# Altium PCB LCR.PcbDoc (part 1 of 2)
Units mil, origin at the board's own origin, x right, y up, seen from the top; angles counter-clockwise.
Board outline 3937.01 x 3149.61 mil, 2 copper layers (Top, Bottom); 95 components, 118 nets, 438 pads, 285 vias.
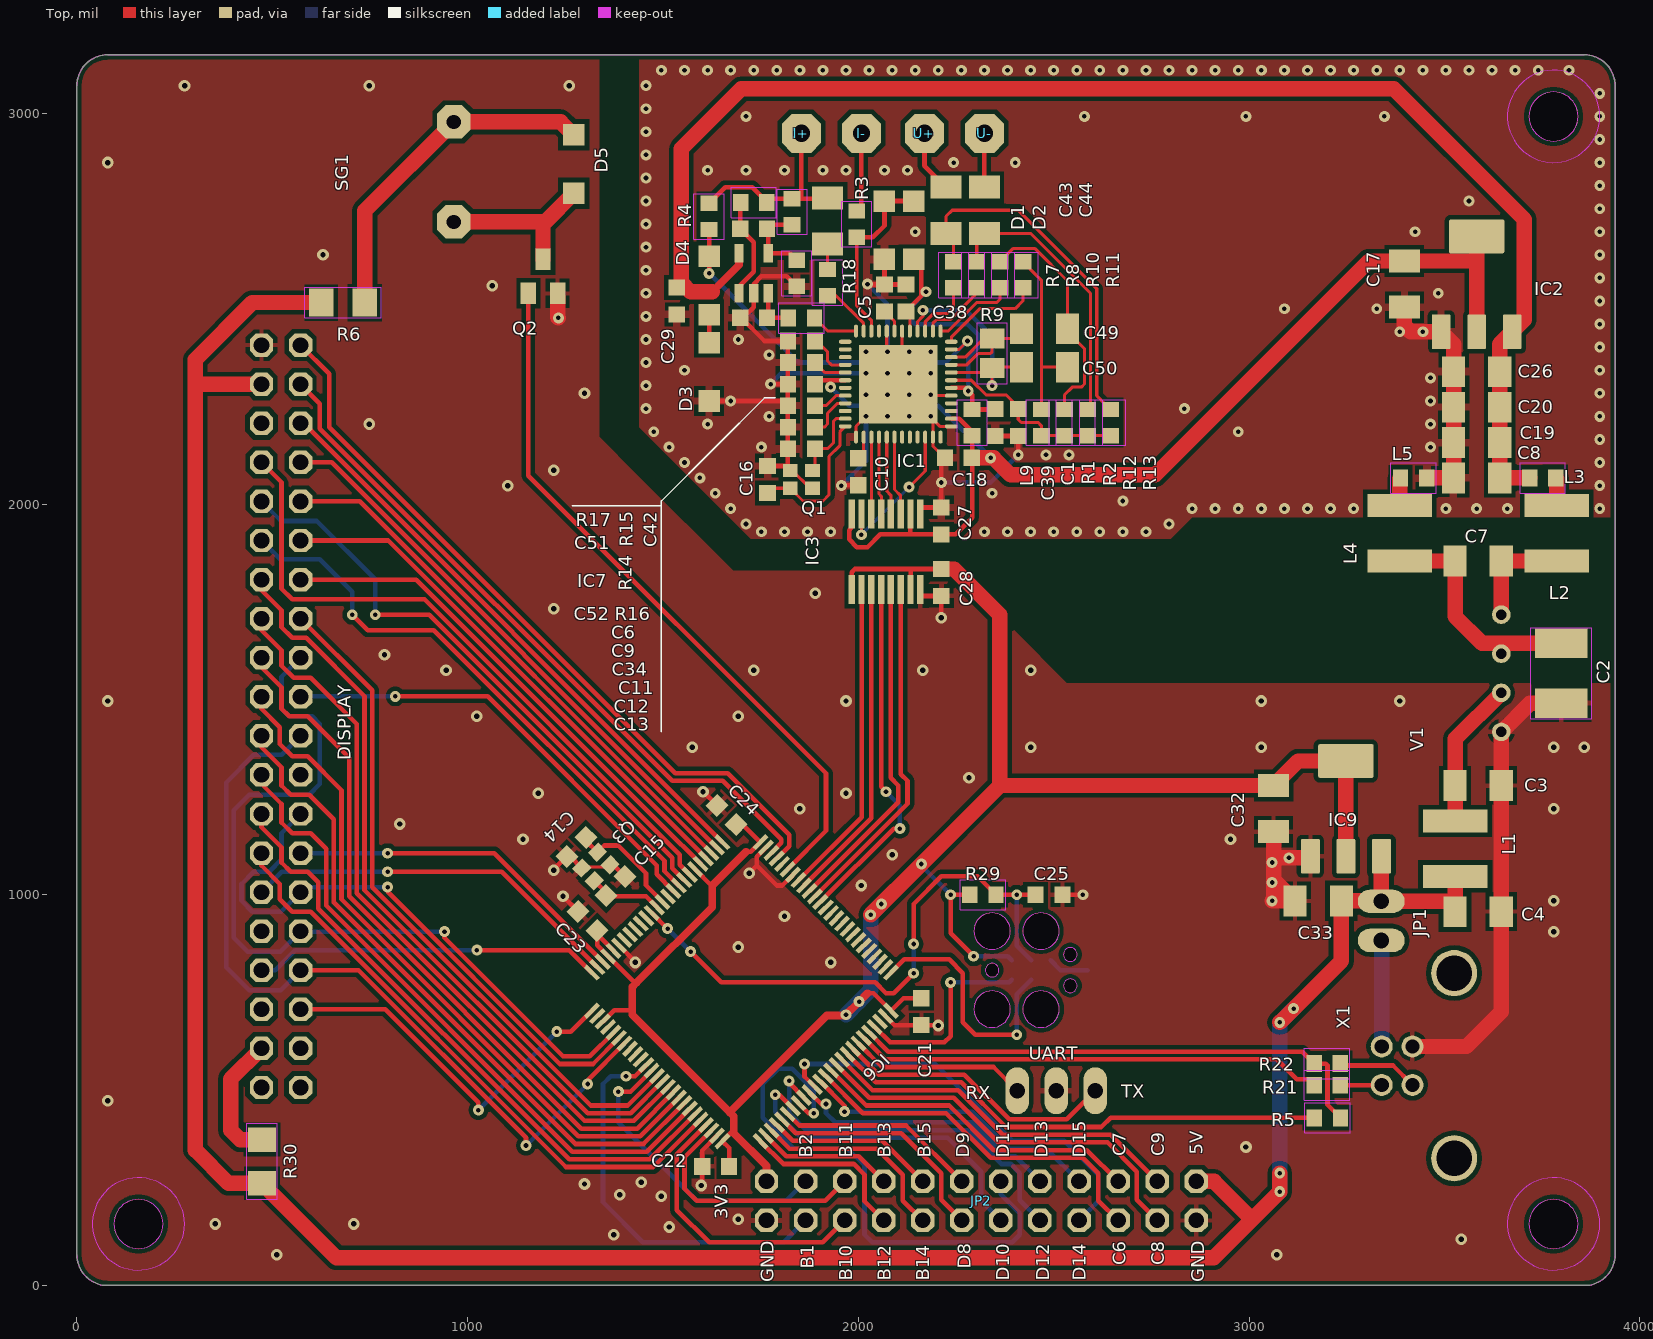
[diagram p0: Top view]
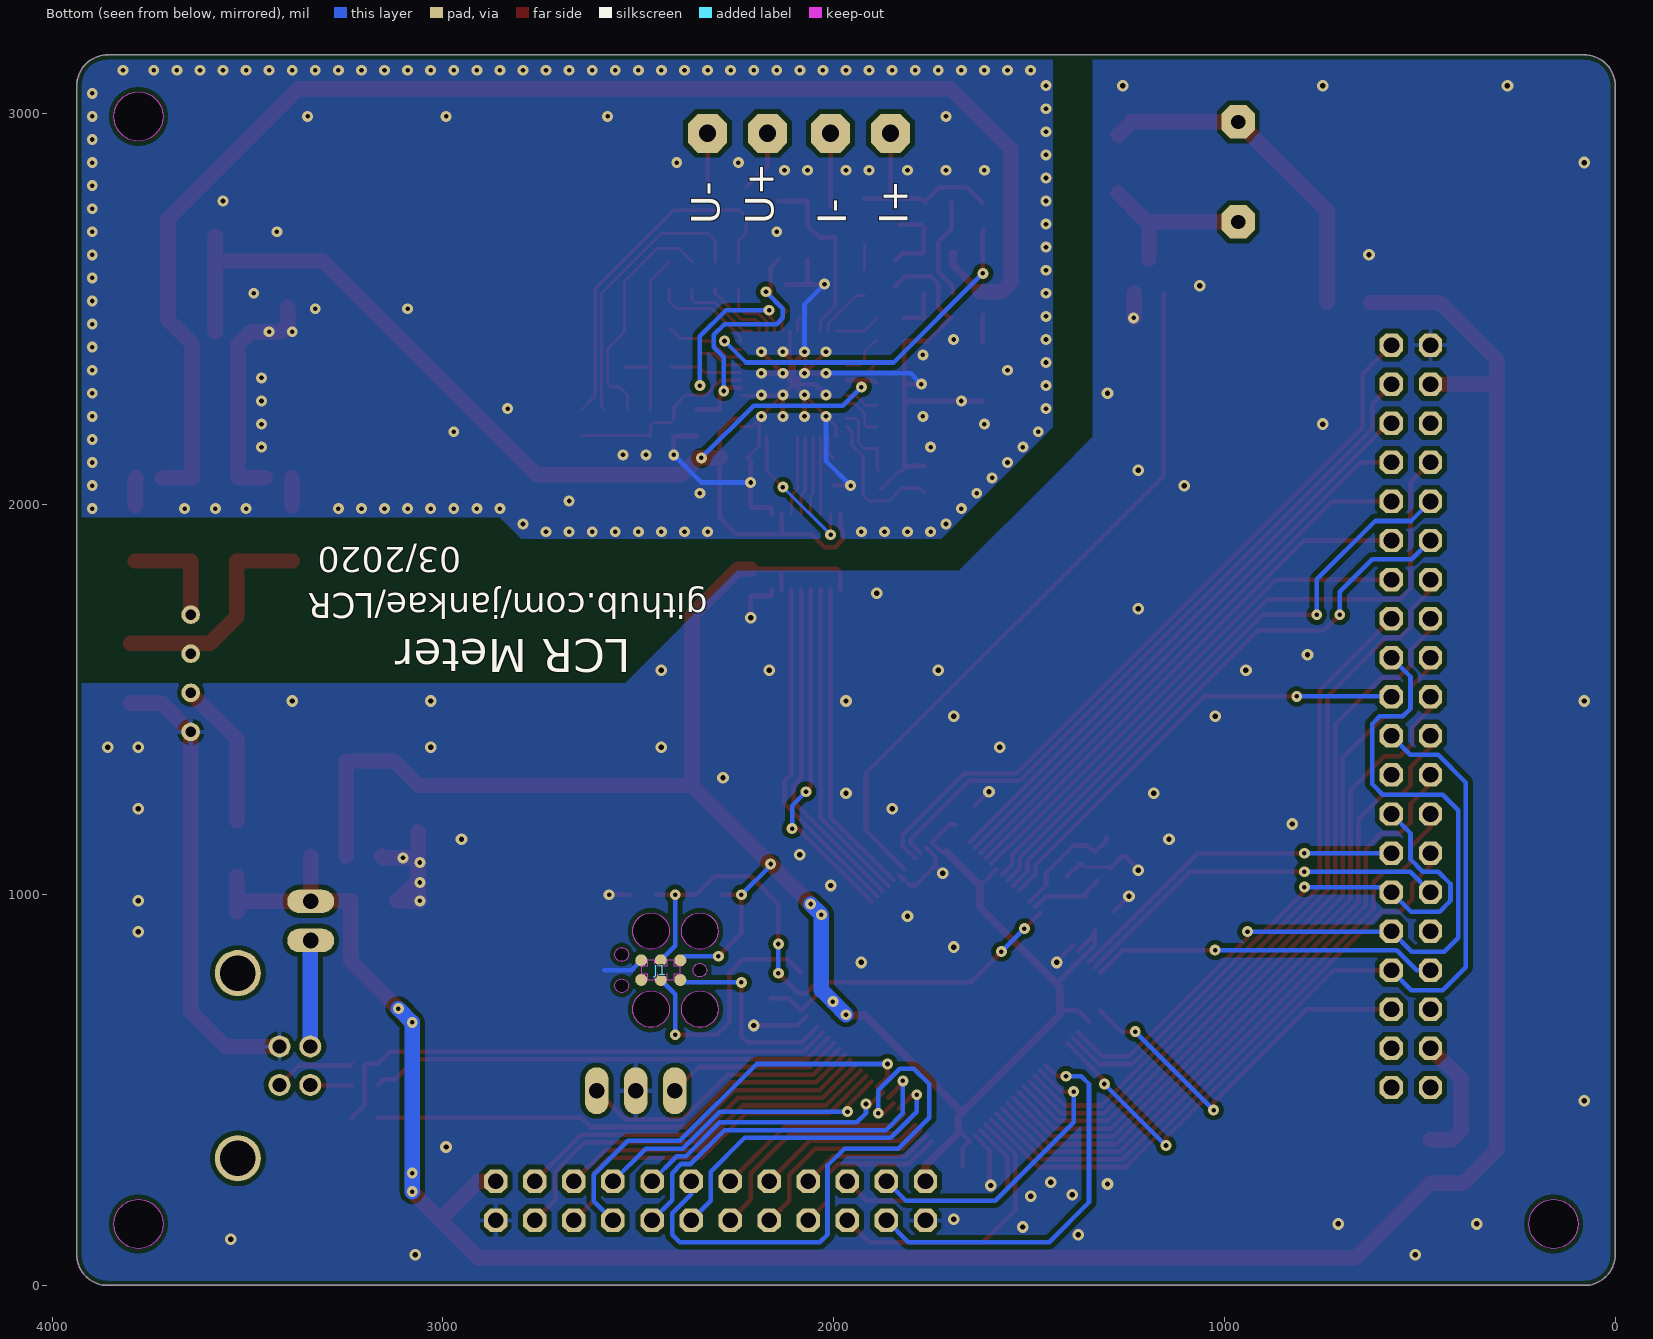
[diagram p1: Bottom view, seen from below]

## Layer stack, top to bottom
Top Solder: solder mask 0.4, Solder Resist, Dk 3.5
Top: signal copper 1.378
Dielectric 1: dielectric 12.6, FR-4, Dk 4.8
Bottom: signal copper 1.378
Bottom Solder: solder mask 0.4, Solder Resist, Dk 3.5

## Board outline
0,78.74 0,3070.87 cw(c78.74,3070.87) 78.74,3149.61 3858.27,3149.61 cw(c3858.27,3070.87) 3937.01,3070.87 3937.01,78.74 cw(c3858.27,78.74) 3858.27,0 78.74,0 cw(c78.74,78.74)
cut-out: 157.48,94.49 ccw(c157.48,157.48) 220.47,157.48 ccw(c157.48,157.48) 157.48,220.47 ccw(c157.48,157.48) 94.49,157.48 ccw(c157.48,157.48)
cut-out: 3779.53,2929.14 ccw(c3779.53,2992.13) 3842.52,2992.13 ccw(c3779.53,2992.13) 3779.53,3055.12 ccw(c3779.53,2992.13) 3716.54,2992.13 ccw(c3779.53,2992.13)
cut-out: 3779.53,94.49 ccw(c3779.53,157.48) 3842.52,157.48 ccw(c3779.53,157.48) 3779.53,220.47 ccw(c3779.53,157.48) 3716.54,157.48 ccw(c3779.53,157.48)
cut-out: 2342.52,860.34 ccw(c2342.52,907.09) 2389.27,907.09 ccw(c2342.52,907.09) 2342.52,953.84 ccw(c2342.52,907.09) 2295.77,907.09 ccw(c2342.52,907.09)
cut-out: 2342.52,660.34 ccw(c2342.52,707.09) 2389.27,707.09 ccw(c2342.52,707.09) 2342.52,753.84 ccw(c2342.52,707.09) 2295.77,707.09 ccw(c2342.52,707.09)
cut-out: 2467.52,660.34 ccw(c2467.52,707.09) 2514.27,707.09 ccw(c2467.52,707.09) 2467.52,753.84 ccw(c2467.52,707.09) 2420.77,707.09 ccw(c2467.52,707.09)
cut-out: 2467.52,860.34 ccw(c2467.52,907.09) 2514.27,907.09 ccw(c2467.52,907.09) 2467.52,953.84 ccw(c2467.52,907.09) 2420.77,907.09 ccw(c2467.52,907.09)
cut-out: 2342.52,789.59 ccw(c2342.52,807.09) 2360.02,807.09 ccw(c2342.52,807.09) 2342.52,824.59 ccw(c2342.52,807.09) 2325.02,807.09 ccw(c2342.52,807.09)
cut-out: 2542.52,829.59 ccw(c2542.52,847.09) 2560.02,847.09 ccw(c2542.52,847.09) 2542.52,864.59 ccw(c2542.52,847.09) 2525.02,847.09 ccw(c2542.52,847.09)
cut-out: 2542.52,749.59 ccw(c2542.52,767.09) 2560.02,767.09 ccw(c2542.52,767.09) 2542.52,784.59 ccw(c2542.52,767.09) 2525.02,767.09 ccw(c2542.52,767.09)

## Design rules (kind name [scope] priority, off if disabled: settings)
BoardOutlineClearance mdCopperDimension [All] p1: gap=10 ignorepadtopadclearanceinfootprint=FALSE except(0: Arc-SplitContinuation Track-SplitContinuation SMDPad-SplitContinuation THPad-SplitContinuation Via-SplitContinuation Fill-SplitContinuation Poly-SplitContinuation Region-SplitContinuation Text-SplitContinuation; 7.87: Poly-OutlineEdge Poly-CavityEdge Poly-CutoutEdge Poly-SplitBarrior)
Clearance Clearance_for_PolygonClass_Isolate_11.81 [InPolygonClass('Isolate_11.81') vs IsArc Or IsTrack Or IsPad Or IsVia Or IsFill Or IsRegion Or IsText] p1: gap=11.81 ignorepadtopadclearanceinfootprint=FALSE
Clearance "Clearance (Same Net)" [All] p2: gap=3.5 ignorepadtopadclearanceinfootprint=FALSE
Clearance [All] p3: gap=3.5 ignorepadtopadclearanceinfootprint=FALSE
HoleSize [All] p1: absolutevalues=TRUE maxlimit=100000 minlimit=11.81 maxpercent=80.000 minpercent=20.000
HoleToHoleClearance mdDrill [All] p1: gap=7.87 allowstackedmicrovias=TRUE
MinimumSolderMaskSliver [All] p1 off: minsoldermaskwidth=10
PasteMaskExpansion Expansion_SMDPaste_OFF [InPadClass('SMDPaste_OFF')] p1: expansion=0
PasteMaskExpansion mlMinCreamFrame [All] p2: expansion=0
PolygonConnect PolygonConnect_For_PolygonThermal_ON_Width196900_Gap100000 [InPolygonClass('PolygonThermal_ON_Width196900_Gap100000') vs Not IsVia] p1: connectstyle=Relief reliefconductorwidth=19.69 reliefentries=4 polygonreliefangle="90 Angle" airgapwidth=10
PolygonConnect PolygonConnect_For_PolygonThermal_ON_Width118100_Gap100000 [InPolygonClass('PolygonThermal_ON_Width118100_Gap100000') vs Not IsVia] p2: connectstyle=Relief reliefconductorwidth=11.81 reliefentries=4 polygonreliefangle="90 Angle" airgapwidth=10
PolygonConnect ThermalVias [IsVia] p3: connectstyle=Direct reliefconductorwidth=10 reliefentries=4 polygonreliefangle="90 Angle" airgapwidth=10
PolygonConnect [All] p4: connectstyle=Relief reliefconductorwidth=10 reliefentries=4 polygonreliefangle="90 Angle" airgapwidth=10
RoutingVias [All] p1: holewidth=11.81 width=27.81 viastyle="Through Hole" minholewidth=11.81 minwidth=27.81 maxholewidth=100 maxwidth=100
SolderMaskExpansion Expansion_SMDSolder_OFF [InPadClass('SMDSolder_OFF')] p1: expansion=0 istentingtop=FALSE
SolderMaskExpansion mlMinStopFrame [All] p2: expansion=4 istentingtop=FALSE
Width [All] p1: maxlimit=10000 minlimit=6 preferedwidth=6
26 further rules are at their usual default settings.

## Classes and differential pairs
polygon class PolygonThermal_ON_Width196900_Gap100000: Polygon_1_Net_AGND Polygon_2_Net_AGND
polygon class PolygonThermal_ON_Width118100_Gap100000: Polygon_1_Net_GND Polygon_2_Net_GND
polygon class Isolate_11.81: Polygon_1_Net_AGND Polygon_1_Net_GND Polygon_2_Net_AGND Polygon_2_Net_GND
pad class SMDSolder_OFF: Q1-1 Q1-2 Q1-3 Q1-4 Q3-1 Q3-2 Q3-3 Q3-4
pad class SMDPaste_OFF: J1-1 J1-2 J1-3 J1-4 J1-5 J1-6 Q1-1 Q1-2 Q1-3 Q1-4 Q3-1 Q3-2 Q3-3 Q3-4

## Components (designator, comment, footprint, x,y, rotation, side; value= is the part's Value field where it differs from the comment)
C1 "470n" C0603K 2409.45,2208.66 r270 top
C2 "470p/3kV" C1812 3799.21,1566.93 r270 top
C3 "10u/16V" C1206K 3586.61,1279.53 r0 top
C4 "10u/16V" C1206K 3586.61,956.69 r0 top
C5 "4u7" C0603K 2066.93,2527.56 r90 top
C6 "470n" C0603K 1854.33,2417.32 r180 top
C7 "10u/25V" C1206K 3586.61,1854.33 r180 top
C8 "10u/25V" C1206K 3582.68,2066.93 r180 top
C9 "470n" C0603K 1854.33,2362.2 r180 top
C10 "470n" C0603K 2000,2082.68 r270 top
C11 "100n" C0603K 1854.33,2251.97 r180 top
C12 "1u" C0603K 1854.33,2196.85 r180 top
C13 "10p" C0603K 1854.33,2141.73 r180 top
C14 "12p" C0603K 1278.29,1122.61 r225 top
C15 "12p" C0603K 1378.51,1022.39 r45 top
C16 "10p" C0603K 1767.72,2062.99 r90 top
C17 "10u/16V" C1206K 3397.64,2562.99 r270 top
C18 "100n" C0603K 2255.91,2118.11 r180 top
C19 "10u/25V" C1206K 3582.68,2157.48 r180 top
C20 "10u/25V" C1206K 3582.68,2248.03 r180 top
C21 "100n" C0603K 2161.42,700.79 r90 top
C22 "100n" C0603K 1635.04,304.43 r0 top
C23 "100n" C0603K 1307.09,933.07 r315 top
C24 "100n" C0603K 1663.05,1204.05 r315 top
C25 "100n" C0603K 2488.19,1000 r0 top
C26 "10u/25V" C1206K 3582.68,2338.58 r180 top
C27 "100n" C0603K 2212.6,1956.69 r90 top
C28 "100n" C0603K 2212.6,1799.21 r270 top
C29 "1u" C0603K 1535.43,2519.69 r90 top
C32 "10u/16V" C1206K 3062.99,1220.47 r270 top
C33 "10u/16V" C1206K 3177.17,984.25 r180 top
C34 "100n" C0603K 1854.33,2307.09 r180 top
C38 "100n" C0603K 2122.05,2527.56 r90 top
C39 "100n" C0603K 2350.39,2208.66 r270 top
C42 "10u" C1206K 1921.26,2724.41 r90 top
C43 "10u" C1206K 2224.41,2751.97 r90 top
C44 "10u" C1206K 2322.83,2751.97 r90 top
C49 "10u" C1206K 2476.38,2448.82 r180 top
C50 "10u" C1206K 2476.38,2350.39 r180 top
C51 "100n" C0603K 1732.28,2704.72 r180 top
C52 "100n" C0603K 1732.28,2476.38 r0 top
D1 "BAS116" SOD123 2066.93,2700.79 r270 top
D2 "BAS116" SOD123 2141.73,2700.79 r90 top
D3 "BAS116" SOD123 1618.11,2338.58 r90 top
D4 "BAS116" SOD123 1618.11,2559.06 r90 top
D5 "4148" SOD123 1271.65,2870.08 r270 top
DISPLAY "SAINSMART_TFT_3.2V" SAINSMART_ANGLED 472.44,1456.69 r270 top
I+ "" 2,54/1,1 1854.33,2948.82 r90 top
I- "" 2,54/1,1 2007.87,2948.82 r90 top
IC1 "AD5941" QFN50P700X700X80-49T510N 2102.36,2307.09 r0 top
IC2 "VREG-TS1117CW-3V3" SOT223 3582.68,2562.99 r90 top
IC3 "SI8651EB-B-IU" SOP63P600X175-16N 2070.87,1877.95 r90 top
IC6 "STM32F303VCT" LQFP100 1700.79,751.97 r225 top
IC7 "OPA237N" SOT23-5 1732.28,2590.55 r0 top
IC9 "VREG-TS1117CW-3V3" SOT223 3248.03,1220.47 r90 top
J1 "" TC2030-MCP 2342.52,807.09 r0 bottom
JP1 "" 1X02 3338.58,933.07 r270 top
JP2 "" 2X12 2314.96,216.54 r0 top
L1 "SRN5020TA-100M" SRN5040 3527.56,1118.11 r90 top
L2 "SRN5020TA-100M" SRN5040 3787.4,1925.2 r90 top
L3 "Ferrite" R0603 3751.97,2066.93 r180 top
L4 "SRN5020TA-100M" SRN5040 3385.83,1925.2 r90 top
L5 "Ferrite" R0603 3421.26,2066.93 r0 top
L9 "Ferrite" R0603 2291.34,2208.66 r90 top
Q1 "FA-128" FA-128 1854.33,2062.99 r180 top
Q2 "BSS123" SOT23 1192.91,2582.68 r0 top
Q3 "FA-128" FA-128 1328.4,1072.5 r225 top
R1 "1M" R0603 2468.5,2208.66 r270 top
R2 "1M" R0603 2527.56,2208.66 r270 top
R3 "10" R0603 1996.06,2716.54 r270 top
R4 "100k" R0603 1618.11,2736.22 r270 top
R5 "1k5" R0603 3200.79,429.13 r180 top
R6 "27" R1206 681.1,2515.75 r180 top
R7 "10k" R0603 2244.09,2586.61 r90 top
R8 "10k" R0603 2303.15,2586.61 r90 top
R9 "1k 0.01% 2ppm" M0805 2342.52,2385.83 r270 top
R10 "10k" R0603 2362.2,2586.61 r90 top
R11 "10k" R0603 2421.26,2586.61 r90 top
R12 "1M" R0603 2586.61,2208.66 r270 top
R13 "1M" R0603 2645.67,2208.66 r270 top
R14 "10k" R0603 1842.52,2590.55 r90 top
R15 "39k" R0603 1830.71,2748.03 r270 top
R16 "10k" R0603 1854.33,2476.38 r0 top
R17 "100" R0603 1732.28,2771.65 r180 top
R18 "10" R0603 1921.26,2566.93 r270 top
R21 "22" R0603 3200,512.5 r0 top
R22 "22" R0603 3200,567.82 r0 top
R29 "10k" R0603 2318.9,1000 r0 top
R30 "27" R1206 473.82,317.42 r270 top
SG1 "CEM-1203(42)" F/QMBIII 964.57,2850.39 r90 top
U+ "" 2,54/1,1 2169.29,2948.82 r90 top
U- "" 2,54/1,1 2322.83,2948.82 r90 top
UART "" 1X03 2506.59,498.43 r0 top
V1 "TBA-1 0512" TME 3645.67,1566.93 r90 top
X1 "MINI-USB_SHIELD4P-85-32004-00X" 85-32004-00X 3525,562.5 r180 top

## Footprints (in the part's own frame and the unit in brackets; to place one, negate y for a bottom-side part, rotate by r counter-clockwise, add the part's x,y. Pads: shape width x height; smd on the part's side, far side on the other; paste and mask are expansions set on the pad)
1X02 [mil] "1X02"
  oval 60x120 hole 40: 1(-50,0) 2(50,0)
1X03 [mil] "1X03"
  oval 60x120 hole 40: 1(-100,0) 2(0,0) 3(100,0)
2,54/1,1 [mil] "2,54/1,1"
  oct 100x100 / inner round 92.39 / far side oct 100x100 hole 44: 1(0,0)
2X12 [mil] "2X12"
  oct 60x60 / inner round 55.43 / far side oct 60x60 hole 40: 1(-550,-50) 2(-550,50) 3(-450,-50) 4(-450,50) 5(-350,-50) 6(-350,50) 7(-250,-50) 8(-250,50) 9(-150,-50) 10(-150,50) 11(-50,-50) 12(-50,50) 13(50,-50) 14(50,50) 15(150,-50) 16(150,50) 17(250,-50) 18(250,50) 19(350,-50) 20(350,50) 21(450,-50) 22(450,50) 23(550,-50) 24(550,50)
85-32004-00X [mm] "85-32004-00X"
  round 1.428 hole 0.92: 1(4.71,-1.25) 2(4.71,1.25) 3(2.71,1.25) 4(2.71,-1.25)
  round 3 hole 2.3: M1(0,6.02) M2(0,-6.02)
C0603K [mm] "C0603K"
  rect 1.05x1.08 smd: 1(-0.875,0) 2(0.875,0)
C1206K [mm] "C1206K"
  rect 1.5x2 smd: 1(-1.5,0) 2(1.5,0)
C1812 [mil] "C1812"
  rect 74.8x133.86 smd: 1(-76.77,0) 2(76.77,0)
  Top keep-out lines w2: 117.05,-78.07 117.05,78.07 -117.05,78.07 -117.05,-78.07 117.05,-78.07
F/QMBIII [mil] "F/QMBIII"
  oct 85x85 / inner round 78.53 / far side oct 85x85 hole 36: +(128,0) -(-128,0)
FA-128 [mil] "FA-128"
  rect 37.4x33.46 smd paste+0 mask+0: 1(-28.54,-22.64) 2(28.54,-22.64) 3(28.54,22.64) 4(-28.54,22.64)
LQFP100 [mm] "LQFP100"
  rect 0.3x1.2 smd: 1(-6,-7.75) 2(-5.5,-7.75) 3(-5,-7.75) 4(-4.5,-7.75) 5(-4,-7.75) 6(-3.5,-7.75) 7(-3,-7.75) 8(-2.5,-7.75) 9(-2,-7.75) 10(-1.5,-7.75) 11(-1,-7.75) 12(-0.5,-7.75) 13(0,-7.75) 14(0.5,-7.75) 15(1,-7.75) 16(1.5,-7.75) 17(2,-7.75) 18(2.5,-7.75) 19(3,-7.75) 20(3.5,-7.75) 21(4,-7.75) 22(4.5,-7.75) 23(5,-7.75) 24(5.5,-7.75) 25(6,-7.75) 51(6,7.75) 52(5.5,7.75) 53(5,7.75) 54(4.5,7.75) 55(4,7.75) 56(3.5,7.75) 57(3,7.75) 58(2.5,7.75) 59(2,7.75) 60(1.5,7.75) 61(1,7.75) 62(0.5,7.75) 63(0,7.75) 64(-0.5,7.75) 65(-1,7.75) 66(-1.5,7.75) 67(-2,7.75) 68(-2.5,7.75) 69(-3,7.75) 70(-3.5,7.75) 71(-4,7.75) 72(-4.5,7.75) 73(-5,7.75) 74(-5.5,7.75) 75(-6,7.75)
  rect 1.2x0.3 smd: 26(7.75,-6) 27(7.75,-5.5) 28(7.75,-5) 29(7.75,-4.5) 30(7.75,-4) 31(7.75,-3.5) 32(7.75,-3) 33(7.75,-2.5) 34(7.75,-2) 35(7.75,-1.5) 36(7.75,-1) 37(7.75,-0.5) 38(7.75,0) 39(7.75,0.5) 40(7.75,1) 41(7.75,1.5) 42(7.75,2) 43(7.75,2.5) 44(7.75,3) 45(7.75,3.5) 46(7.75,4) 47(7.75,4.5) 48(7.75,5) 49(7.75,5.5) 50(7.75,6) 76(-7.75,6) 77(-7.75,5.5) 78(-7.75,5) 79(-7.75,4.5) 80(-7.75,4) 81(-7.75,3.5) 82(-7.75,3) 83(-7.75,2.5) 84(-7.75,2) 85(-7.75,1.5) 86(-7.75,1) 87(-7.75,0.5) 88(-7.75,0) 89(-7.75,-0.5) 90(-7.75,-1) 91(-7.75,-1.5) 92(-7.75,-2) 93(-7.75,-2.5) 94(-7.75,-3) 95(-7.75,-3.5) 96(-7.75,-4) 97(-7.75,-4.5) 98(-7.75,-5) 99(-7.75,-5.5) 100(-7.75,-6)
M0805 [mil] "M0805"
  rect 51.18x62.99 smd: 1(-37.4,0) 2(37.4,0)
  Top keep-out lines w2: 77.68,-38.7 77.68,38.7 -77.68,38.7 -77.68,-38.7 77.68,-38.7
QFN50P700X700X80-49T510N [mil] "QFN50P700X700X80-49T510N"
  rrect100% 32.99x10.39 smd: 1(-135.65,108.27) 2(-135.65,88.58) 3(-135.65,68.9) 4(-135.65,49.21) 5(-135.65,29.53) 6(-135.65,9.84) 7(-135.65,-9.84) 8(-135.65,-29.53) 9(-135.65,-49.21) 10(-135.65,-68.9) 11(-135.65,-88.58) 12(-135.65,-108.27) 25(135.65,-108.27) 26(135.65,-88.58) 27(135.65,-68.9) 28(135.65,-49.21) 29(135.65,-29.53) 30(135.65,-9.84) 31(135.65,9.84) 32(135.65,29.53) 33(135.65,49.21) 34(135.65,68.9) 35(135.65,88.58) 36(135.65,108.27)
  rrect100% 10.39x32.99 smd: 13(-108.27,-135.65) 14(-88.58,-135.65) 15(-68.9,-135.65) 16(-49.21,-135.65) 17(-29.53,-135.65) 18(-9.84,-135.65) 19(9.84,-135.65) 20(29.53,-135.65) 21(49.21,-135.65) 22(68.9,-135.65) 23(88.58,-135.65) 24(108.27,-135.65) 37(108.27,135.65) 38(88.58,135.65) 39(68.9,135.65) 40(49.21,135.65) 41(29.53,135.65) 42(9.84,135.65) 43(-9.84,135.65) 44(-29.53,135.65) 45(-49.21,135.65) 46(-68.9,135.65) 47(-88.58,135.65) 48(-108.27,135.65)
  rect 200.79x200.79 smd: 49(0,0)
R0603 [mm] "R0603"
  rect 1x1.1 smd: 1(-0.85,0) 2(0.85,0)
  Top keep-out lines w0.051: 1.473,0.983 1.473,-0.983 -1.473,-0.983 -1.473,0.983 1.473,0.983
R1206 [mil] "R1206"
  rect 62.99x70.98 smd: 1(-55.98,0) 2(55.98,0)
  Top keep-out lines w2: 97.36,38.7 97.36,-38.7 -97.36,-38.7 -97.36,38.7 97.36,38.7
SAINSMART_ANGLED [mil] "SAINSMART_ANGLED"
  oct 60x60 / inner round 55.43 / far side oct 60x60 hole 40: 1(-950,0) 2(-950,100) 3(-850,0) 4(-850,100) 5(-750,0) 6(-750,100) 7(-650,0) 8(-650,100) 9(-550,0) 10(-550,100) 11(-450,0) 12(-450,100) 13(-350,0) 14(-350,100) 15(-250,0) 16(-250,100) 17(-150,0) 18(-150,100) 19(-50,0) 20(-50,100) 21(50,0) 22(50,100) 23(150,0) 24(150,100) 25(250,0) 26(250,100) 27(350,0) 28(350,100) 29(450,0) 30(450,100) 31(550,0) 32(550,100) 33(650,0) 34(650,100) 35(750,0) 36(750,100) 37(850,0) 38(850,100) 39(950,0) 40(950,100)
SOD123 [mil] "SOD123"
  rect 55.12x55.12 smd: A(74.8,0) C(-74.8,0)
SOP63P600X175-16N [mil] "SOP63P600X175-16N"
  rect 74.84x16.14 smd: 1(-96.67,87.5) 2(-96.67,62.5) 3(-96.67,37.5) 4(-96.67,12.5) 5(-96.67,-12.5) 6(-96.67,-37.5) 7(-96.67,-62.5) 8(-96.67,-87.5) 9(96.67,-87.5) 10(96.67,-62.5) 11(96.67,-37.5) 12(96.67,-12.5) 13(96.67,12.5) 14(96.67,37.5) 15(96.67,62.5) 16(96.67,87.5)
SOT23 [mm] "SOT23"
  rect 1x1.4 smd: 1(-0.95,-1.1) 2(0.95,-1.1) 3(0,1.1)
SOT23-5 [mil] "SOT23-5"
  rect 23.62x47.24 smd: 1(-37.4,-51.42) 2(0,-51.42) 3(37.4,-51.42) 4(37.4,51.42) 5(-37.4,51.42)
SOT223 [mil] "SOT223"
  rrect10% 87.99x47.99 smd: 1(-122.01,90.98) 2(-122.01,0) 3(-122.01,-90.98)
  rrect10% 86.61x141.73 smd: 4(122.01,0)
SRN5040 [mil] "SRN5040"
  rect 59.06x165.35 smd: P$1(-70.87,0) P$2(70.87,0)
TC2030-MCP [mil] "TC2030-MCP"
  rrect100% 31x31 smd paste+0: 1(50,-25) 2(50,25) 3(100,-25) 4(100,25) 5(150,-25) 6(150,25)
  Top keep-out region: 50,-9.5 65.5,-9.5 65.5,-25 84.5,-25 84.5,-9.5 115.5,-9.5 115.5,-25 134.5,-25 134.5,-9.5 150,-9.5 150,9.5 134.5,9.5 134.5,25 115.5,25 115.5,9.5 84.5,9.5 84.5,25 65.5,25 65.5,9.5 50,9.5 50,-9.5
TME [mil] "TME"
  round 47.56 hole 27.56: 1(-150,0) 2(-50,0) 3(50,0) 4(150,0)

## Part data
C1 C5 C6 C9 C10 C11 C12 C13 C14 C15 C16 C18 C21 C22 C23 C24 C25 C27 C28 C29 C34 C38 C39 C51 C52: library part C0603K, PackageName=C0603K
C2: library part C1812, PackageName=C1812
C3 C4 C7 C8 C17 C19 C20 C26 C32 C33 C42 C43 C44 C49 C50: library part C1206K, PackageName=C1206K
D1 D2 D3 D4 D5: library part SOD123, PackageName=SOD123
DISPLAY: library part SAINSMART_ANGLED, PackageName=SAINSMART_ANGLED
I+ I- U+ U-: library part 2,54/1,1, PackageName=2,54/1,1
IC1: library part QFN50P700X700X80-49T510N, PackageName=QFN50P700X700X80-49T510N
IC2 IC9: library part SOT223, PackageName=SOT223
IC3: library part SOP63P600X175-16N, PackageName=SOP63P600X175-16N
IC6: library part LQFP100, PackageName=LQFP100
IC7: library part SOT23-5, PackageName=SOT23-5
J1: library part TC2030-MCP, PackageName=TC2030-MCP
JP1: library part 1X02, PackageName=1X02
JP2: library part 2X12, PackageName=2X12
L1 L2 L4: library part SRN5040, PackageName=SRN5040
L3 L5 L9 R1 R2 R3 R4 R5 R7 R8 R10 R11 R12 R13 R14 R15 R16 R17 R18 R21 R22 R29: library part R0603, PackageName=R0603
Q2: library part SOT23, PackageName=SOT23
R6 R30: library part R1206, PackageName=R1206
R9: library part M0805, PackageName=M0805
SG1: library part F/QMBIII, PackageName=F/QMBIII
UART: library part 1X03, PackageName=1X03
V1: library part TME, PackageName=TME
X1: library part 85-32004-00X, PackageName=85-32004-00X
Q1 Q3: PackageName=FA-128

## Free pads (board coordinates)
  round 35 hole 35 unplated: MH1(2342.52,807.09) MH2(2542.52,847.09) MH3(2542.52,767.09)
  round 125.98 hole 125.98 unplated: MH1(3779.53,157.48) MH2(3779.53,2992.13) MH3(157.48,157.48)
  round 93.5 hole 93.5 unplated: MH4(2342.52,707.09) MH5(2342.52,907.09) MH6(2467.52,907.09) MH7(2467.52,707.09)

## Via types
v1: diameter 27.81/27.81 (per signal layer), hole 11.81, Top to Bottom, 220 vias
v2: diameter 29.78/29.78 (per signal layer), hole 13.78, Top to Bottom, 65 vias

## Nets (pads, with @x,y where several pads share a name; then routed paths per layer and width w, separated by ;. In a path a pad name is that pad's centre, name@x,y a point inside that pad or via, vN(x,y) a via of type N, cw(c..) or ccw(c..) an arc to the next point about the centre after c; other vN are vias at no path point)
+3V3: C21.2 C22.2 C23.2 C24.2 C28.1 C32.1 IC3.1 IC3.7 IC6.6 IC6.21 IC6.22 IC6.28 IC6.50 IC6.75 IC6.100 IC9.2 IC9.4 J1.1 JP2.2 R29.1 | length 5779.6
  Top w11.81: IC6.28@1345.84,675.41 1375.15,704.72 1421.26,704.72 ; IC6.21@1373.68,856.37 1331.45,898.6 C23.2@1331.45,908.71 1331.45,870.76 IC6.22@1359.76,842.44 1426.62,775.59 1433.07,775.59 ; IC6.6@1582.48,1065.16 1624.01,1023.62 1625.98,1023.62 ; C22.2@1669.49,304.43 1669.49,351.77 IC6.50@1652.07,369.18 1681.1,398.22 1681.1,433.07 ; C24.2@1687.41,1179.69 1704.57,1179.69 IC6.100@1749.51,1134.76 1724.99,1110.24 1712.6,1110.24 ; IC3.1@1983.37,1781.28 1983.37,1825.89 1991.14,1833.66 2133.86,1833.66 ; 2023.62,748.03 2038.79,748.03 2083.57,703.25 2115.56,735.24 C21.2@2161.42,735.24 ; IC3.7@2133.37,1781.28 2133.86,1781.78 2133.86,1833.66 ; C28.1@2212.6,1833.66 2133.86,1833.66 ; R29.1@2285.44,1000 v1(2236.22,1000) 2236.22,901.57 v1(2295.28,842.52)
  Top w19.69: 1712.6,1110.24 1625.98,1023.62 1625.98,968.5 1433.07,775.59 1421.26,763.78 1421.26,704.72 1421.26,692.91 1671.26,442.91 ; JP2.2@1764.96,266.54 1764.96,305.91 1681.1,389.76 1681.1,433.07 1671.26,442.91 ; 2023.62,748.03 v1(2001.97,726.38) 1966.54,690.94 1919.29,690.94 1671.26,442.91
  Top w39.37: v1(2031.5,948.82) v1(2161.42,1078.74) 2362.2,1279.53 ; C28.1@2212.6,1833.66 2245.08,1833.66 2362.2,1716.54 2362.2,1279.53 ; IC9.2@3248.03,1098.46 IC9.4@3248.03,1342.48 3125.94,1342.48 C32.1@3062.99,1279.53 2362.2,1279.53
  Bottom w11.81: v1(2161.42,1078.74) 2161.42,1074.8 v1(2236.22,1000) ; v1(2295.28,842.52) 2382.09,842.52 J1.1@2392.52,832.09
  Bottom w39.37: v1(1968.5,692.91) v1(2001.97,726.38) 2031.5,755.91 v1(2031.5,948.82) v1(2059.06,976.38)
+5V: C4.1 C33.1 DISPLAY.3 IC9.3 JP1.1 JP2.24 L1.P$1 R6.2 R30.2 | length 7122.9
  Top w39.37: DISPLAY.3@472.44,2306.69 472.05,2307.09 303.15,2307.09 ; R6.2@625.12,2515.75 448.82,2515.75 303.15,2370.08 303.15,2307.09 ; JP2.24@2864.96,266.54 2910.63,266.54 3007.87,169.29 ; v1(3078.74,287.4) v1(3078.74,240.16) 3007.87,169.29 ; v1(3078.74,673.23) 3236.22,830.71 C33.1@3236.23,984.25 3337.4,984.25 JP1.1@3338.58,983.07 ; IC9.3@3339.01,1098.46 3338.58,1098.03 JP1.1@3338.58,983.07 ; C4.1@3527.55,956.69 3526.38,957.87 C4.1@3526.38,983.07 ; L1.P$1@3527.56,1047.24 3527.56,984.25 C4.1@3526.38,983.07 ; 303.15,2307.09 303.15,346.46 388.17,261.44 R30.2@473.82,261.44 664.39,70.87 2909.45,70.87 3007.87,169.29 ; JP1.1@3338.58,983.07 C4.1@3526.38,983.07
  Bottom w39.37: v1(3078.74,240.16) v1(3078.74,673.23) v1(3114.17,708.66)
+12V: C8.1 C19.1 C20.1 C26.1 C29.2 IC2.3 IC7.5 L3.2 | length 3699.9
  Top w6: C29.2@1535.43,2554.14 1547.24,2565.94 C29.2@1547.24,2566.93
  Top w19.69: 1625.98,2543.31 1694.88,2612.2 IC7.5@1694.88,2641.97
  Top w39.37: 1625.98,2543.31 1570.87,2543.31 1547.24,2566.93 1547.24,2909.45 1700.79,3062.99 3370.08,3062.99 3704.72,2728.35 3704.72,2472.05 IC2.3@3673.66,2440.98 3641.73,2409.06 C26.1@3641.74,2338.58 C20.1@3641.74,2248.03 C19.1@3641.74,2157.48 C8.1@3641.74,2066.93 L3.2@3718.51,2066.93
AD5941_CS: IC3.3 IC6.92 | length 829.3
  Top w11.81: IC6.92@1860.86,1023.4 2033.37,1195.9 IC3.3@2033.37,1781.28
AD5941_MISO: IC3.6 IC6.90 | length 891.3
  Top w11.81: IC6.90@1888.7,995.56 2125.98,1232.84 2125.98,1291.34 2108.37,1308.96 IC3.6@2108.37,1781.28
AD5941_MOSI: IC3.5 IC6.91 | length 874.5
  Top w11.81: IC6.91@1874.78,1009.48 2102.36,1237.06 2102.36,1279.53 2082.68,1299.21 2082.68,1780.59 IC3.5@2083.37,1781.28
AD5941_RESET: IC3.2 IC6.93 | length 810.8
  Top w11.81: IC6.93@1846.94,1037.32 2008.37,1198.74 IC3.2@2008.37,1781.28
AD5941_SCLK: IC3.4 IC6.89 | length 913.3
  Top w11.81: IC6.89@1902.62,981.65 2090.27,1169.29 v1(2106.3,1169.29) ; IC3.4@2058.37,1781.28 2058.37,1276.28 v1(2070.87,1263.78)
  Bottom w11.81: v1(2070.87,1263.78) 2106.3,1228.35 v1(2106.3,1169.29)
AGND: C1.2 C5.2 C6.2 C8.2 C9.2 C10.2 C11.2 C12.2 C13.2 C16.2 C17.2 C18.2 C19.2 C20.2 C26.2 C27.2 C29.1 C34.2 C38.2 C39.2 C52.1 D1.A D3.C IC1.13 IC1.23 IC1.25 IC1.29 IC1.42 IC1.44 IC1.49 IC2.1 IC3.9 IC7.2 L5.2 Q1.2 Q1.4 R14.1 | length 5251.2
  Top w7.87: Q1.2@1825.79,2085.63 1831.69,2085.63 1876.97,2040.35 Q1.4@1882.87,2040.35 ; IC1.13@1994.09,2171.44 1994.09,2198.82 v1(2019.69,2224.41) IC1.49@2096.46,2301.18 ; IC1.44@2072.83,2442.74 2072.83,2389.76 2072.83,2336.61 IC1.49@2106.3,2303.15 ; IC1.42@2112.2,2442.74 2112.2,2316.93 IC1.49@2096.46,2301.18 ; C18.2@2221.46,2118.11 2190.94,2148.62 IC1.23@2190.94,2171.44 IC1.49@2190.94,2216.54 ; IC1.25@2238.01,2198.82 2208.66,2198.82 IC1.49@2190.94,2216.54 ; IC1.29@2238.01,2277.56 2181.1,2277.56 2149.61,2277.56 IC1.49@2131.89,2277.56 ; IC1.49@2096.46,2301.18 IC1.49@2102.36,2307.09 ; IC1.49@2102.36,2307.09 IC1.49@2106.3,2303.15 ; IC1.49@2102.36,2307.09 IC1.49@2106.3,2303.15 ; IC1.49@2106.3,2303.15 IC1.49@2108.27,2301.18 ; IC1.49@2106.3,2303.15 IC1.49@2108.27,2301.18 ; IC1.49@2108.27,2301.18 IC1.49@2110.24,2299.21 ; IC1.49@2108.27,2301.18 IC1.49@2110.24,2299.21 ; IC1.49@2110.24,2299.21 IC1.49@2131.89,2277.56 ; IC1.49@2110.24,2299.21 IC1.49@2131.89,2277.56 ; IC1.49@2131.89,2277.56 2133.86,2275.59 v1(2185.04,2224.41) 2190.94,2218.5 IC1.49@2190.94,2216.54
  Top w11.81: D3.C@1618.11,2263.78 1808.07,2263.78 C11.2@1819.88,2251.97 ; C52.1@1697.83,2476.38 C52.1@1700.79,2476.38 ; C16.2@1767.72,2097.44 1813.98,2097.44 Q1.2@1817.91,2093.5 ; v1(1775.59,2307.09) C34.2@1819.88,2307.09 ; Q1.2@1825.79,2085.63 Q1.2@1817.91,2093.5 ; R14.1@1842.52,2557.09 1816.93,2582.68 1751.97,2582.68 1732.28,2562.99 IC7.2@1732.28,2539.13 1732.28,2503.94 1704.72,2476.38 C52.1@1700.79,2476.38 ; v1(1956.69,2047.24) 1957.68,2048.23 C10.2@2000,2048.23 ; v1(2019.69,2279.53) 2047.24,2307.09 IC1.49@2102.36,2307.09 ; v1(2019.69,2334.65) v1(2074.8,2334.65) IC1.49@2102.36,2307.09 ; v1(2019.69,2389.76) IC1.49@2102.36,2307.09 ; v1(2023.62,2562.99) 2024.61,2562.01 C5.2@2066.93,2562.01 ; D1.A@2066.93,2625.99 C5.2@2066.93,2562.01 ; IC1.49@2072.83,2389.76 2102.36,2360.24 IC1.49@2102.36,2307.09 ; v1(2074.8,2224.41) v1(2074.8,2279.53) IC1.49@2102.36,2307.09 ; v1(2074.8,2389.76) IC1.49@2102.36,2362.2 ; C38.2@2122.05,2562.01 C5.2@2066.93,2562.01 ; v1(2129.92,2224.41) v1(2129.92,2279.53) IC1.49@2102.36,2307.09 ; v1(2129.92,2389.76) IC1.49@2102.36,2362.2 ; IC1.49@2149.61,2277.56 IC1.49@2131.89,2277.56 ; IC3.9@2158.37,1974.62 2158.37,1991.14 C27.2@2212.6,1991.14 v1(2212.6,2055.12) 2212.6,2109.25 C18.2@2221.46,2118.11 ; IC1.49@2181.1,2277.56 IC1.49@2131.89,2277.56 ; v1(2185.04,2334.65) v1(2129.92,2334.65) IC1.49@2102.36,2307.09 ; v1(2185.04,2389.76) 2112.2,2316.93 IC1.49@2102.36,2307.09 ; C39.2@2350.39,2174.21 C1.2@2409.45,2174.21 v1(2409.45,2125.98) ; C52.1@1700.79,2476.38 1759.84,2417.32 C6.2@1819.88,2417.32 C9.2@1819.88,2362.2 C34.2@1819.88,2307.09 ; Q1.2@1817.91,2093.5 1819.88,2095.47 C13.2@1819.88,2141.73 C12.2@1819.88,2196.85 C11.2@1819.88,2251.97 ; C11.2@1819.88,2251.97 C34.2@1819.88,2307.09 ; IC1.49@2102.36,2307.09 2133.86,2275.59 IC1.49@2131.89,2277.56 ; IC1.49@2102.36,2307.09 IC1.49@2102.36,2362.2 ; IC1.49@2102.36,2307.09 IC1.49@2102.36,2362.2 ; IC1.49@2102.36,2307.09 IC1.49@2110.24,2299.21 ; IC1.49@2102.36,2307.09 IC1.49@2108.27,2301.18 ; IC1.49@2102.36,2307.09 IC1.49@2108.27,2301.18 ; IC1.49@2102.36,2307.09 IC1.49@2108.27,2301.18 ; IC1.49@2108.27,2301.18 IC1.49@2110.24,2299.21 ; IC1.49@2108.27,2301.18 IC1.49@2110.24,2299.21 ; IC1.49@2108.27,2301.18 IC1.49@2110.24,2299.21 ; IC1.49@2110.24,2299.21 IC1.49@2131.89,2277.56 ; IC1.49@2110.24,2299.21 IC1.49@2131.89,2277.56 ; IC1.49@2110.24,2299.21 IC1.49@2131.89,2277.56
  Top w39.37: C17.2@3397.64,2503.93 3397.64,2456.69 3413.35,2440.98 IC2.1@3491.7,2440.98 3523.62,2409.06 C26.2@3523.62,2338.58 C20.2@3523.62,2248.03 C19.2@3523.62,2157.48 C8.2@3523.62,2066.93 L5.2@3454.72,2066.93
  Bottom w11.81: v1(1775.59,2307.09) 1803.15,2334.65 v1(2019.69,2334.65) ; v1(1956.69,2047.24) 2019.69,2110.24 v1(2019.69,2224.41) ; v1(2023.62,2562.99) 2074.8,2511.81 v1(2074.8,2389.76) ; v1(2212.6,2055.12) 2338.58,2055.12 v1(2409.45,2125.98)
  other v1: 1751.97,1929.13 1811.02,1929.13 1870.08,1929.13 1929.13,1929.13 2322.83,1929.13 2381.89,1929.13 2440.94,1929.13 2500,1929.13 2559.06,1929.13 2618.11,1929.13 2677.17,1929.13 2736.22,1929.13 1712.6,1948.82 2795.28,1948.82 1673.23,1988.19 2854.33,1988.19 2913.39,1988.19 2972.44,1988.19 3031.5,1988.19 3090.55,1988.19 3149.61,1988.19 3208.66,1988.19 3267.72,1988.19 3503.94,1988.19 3582.68,1988.19 3661.42,1988.19 3897.64,1988.19 2677.17,2007.87 1633.86,2027.56 2342.52,2027.56 3897.64,2047.24 1594.49,2066.93 1555.12,2106.3 3897.64,2106.3 2480.32,2125.98 2539.37,2125.98 1515.75,2145.67 1751.97,2145.67 3464.57,2145.67 3897.64,2165.35 1476.38,2185.04 2972.44,2185.04 1614.17,2204.72 3464.57,2204.72 1771.65,2224.41 3897.64,2224.41 1456.69,2244.09 2834.65,2244.09 1673.23,2263.78 3464.57,2263.78 2185.04,2279.53 3897.64,2283.46 1456.69,2303.15 3464.57,2322.83 1555.12,2342.52 3897.64,2342.52 1456.69,2362.2 1771.65,2381.89 3897.64,2401.57 1456.69,2421.26 1692.91,2421.26 3385.83,2440.94 3444.88,2440.94 3897.64,2460.63 1456.69,2480.32 3090.55,2500 3326.77,2500 3897.64,2519.69 1456.69,2539.37 3484.25,2539.37 3897.64,2578.74 1456.69,2598.43 3897.64,2637.8 1456.69,2657.48 2145.67,2696.85 3425.2,2696.85 3897.64,2696.85 1456.69,2716.54 3897.64,2755.91 1456.69,2775.59 3562.99,2775.59 3897.64,2814.96 1456.69,2834.65 1614.17,2854.33 1712.6,2854.33 1811.02,2854.33 1909.45,2854.33 1968.5,2854.33 2066.93,2854.33 2125.98,2854.33 2244.09,2874.02 2401.57,2874.02 3897.64,2874.02 1456.69,2893.7 3897.64,2933.07 1456.69,2952.76 1712.6,2992.13 2578.74,2992.13 2992.13,2992.13 3346.46,2992.13 3897.64,2992.13 1456.69,3011.81 3897.64,3051.18 1456.69,3070.87 1496.06,3110.24 1555.12,3110.24 1614.17,3110.24 1673.23,3110.24 1732.28,3110.24 1791.34,3110.24 1850.39,3110.24 1909.45,3110.24 1968.5,3110.24 2027.56,3110.24 2086.61,3110.24 2145.67,3110.24 2204.72,3110.24 2263.78,3110.24 2322.83,3110.24 2381.89,3110.24 2440.94,3110.24 2500,3110.24 2559.06,3110.24 2618.11,3110.24 2677.17,3110.24 2736.22,3110.24 2795.28,3110.24 2854.33,3110.24 2913.39,3110.24 2972.44,3110.24 3031.5,3110.24 3090.55,3110.24 3149.61,3110.24 3208.66,3110.24 3267.72,3110.24 3326.77,3110.24 3385.83,3110.24 3444.88,3110.24 3503.94,3110.24 3562.99,3110.24 3622.05,3110.24 3681.1,3110.24 3740.16,3110.24 3818.9,3110.24
EXT_3: IC6.36 JP2.3 | length 1018.1
  Top w11.81: v1(1405.51,535.43) 1428.57,535.43 IC6.36@1457.2,564.06
  Bottom w11.81: v1(1405.51,535.43) 1366.14,535.43 1346.46,515.75 1346.46,212.6 1448.82,110.24 1808.66,110.24 JP2.3@1864.96,166.54
EXT_4: IC6.37 JP2.4 | length 769.4
  Top w11.81: v1(1385.83,496.06) 1417.04,496.06 IC6.37@1471.11,550.14
  Bottom w11.81: v1(1385.83,496.06) 1385.83,417.32 1586.61,216.54 1814.96,216.54 JP2.4@1864.96,266.54
EXT_5: IC6.47 JP2.5 | length 736.1
  Top w11.81: IC6.47@1610.32,410.94 1535.43,336.06 1535.43,192.91 1618.11,110.24 1908.66,110.24 JP2.5@1964.96,166.54
EXT_6: IC6.48 JP2.6 | length 621.2
  Top w11.81: IC6.48@1624.23,397.02 1555.12,327.91 1555.12,248.03 1586.61,216.54 1914.96,216.54 JP2.6@1964.96,266.54
EXT_7: IC6.51 JP2.7 | length 439
  Top w11.81: IC6.51@1749.51,369.18 1807.67,311.02 1988.19,311.02 2015.75,283.46 2015.75,215.75 JP2.7@2064.96,166.54
EXT_8: IC6.52 JP2.8 | length 349.8
  Top w11.81: IC6.52@1763.43,383.1 1815.82,330.71 2000.79,330.71 JP2.8@2064.96,266.54
EXT_9: IC6.53 JP2.9 | length 521.8
  Top w11.81: IC6.53@1777.35,397.02 1823.97,350.39 2047.24,350.39 2114.17,283.46 2114.17,217.32 JP2.9@2164.96,166.54
EXT_10: IC6.54 JP2.10 | length 433.5
  Top w11.81: IC6.54@1791.26,410.94 1832.13,370.08 2061.42,370.08 JP2.10@2164.96,266.54
EXT_11: IC6.55 JP2.11 | length 606.9
  Top w11.81: IC6.55@1805.19,424.86 1840.28,389.76 2110.24,389.76 2212.6,287.4 2212.6,218.9 JP2.11@2264.96,166.54
EXT_12: IC6.56 JP2.12 | length 517.2
  Top w11.81: IC6.56@1819.1,438.78 1848.44,409.45 2122.05,409.45 JP2.12@2264.96,266.54
EXT_13: IC6.57 JP2.13 | length 840.3
  Top w11.81: v1(1787.4,488.19) 1797.53,488.19 IC6.57@1833.03,452.7
  Bottom w11.81: v1(1787.4,488.19) 1787.4,444.88 1854.33,377.95 2228.35,377.95 2314.96,291.34 2314.96,216.54 JP2.13@2364.96,166.54